# Altium PCB soldering_station.PcbDoc
Units mil, origin at the board's own origin, x right, y up, seen from the top; angles counter-clockwise.
Board outline 3150 x 1400 mil, 2 copper layers (Top Layer, Bottom Layer); 88 components, 44 nets, 261 pads, 16 vias.
Unrouted connection lines stored in the file: 50.
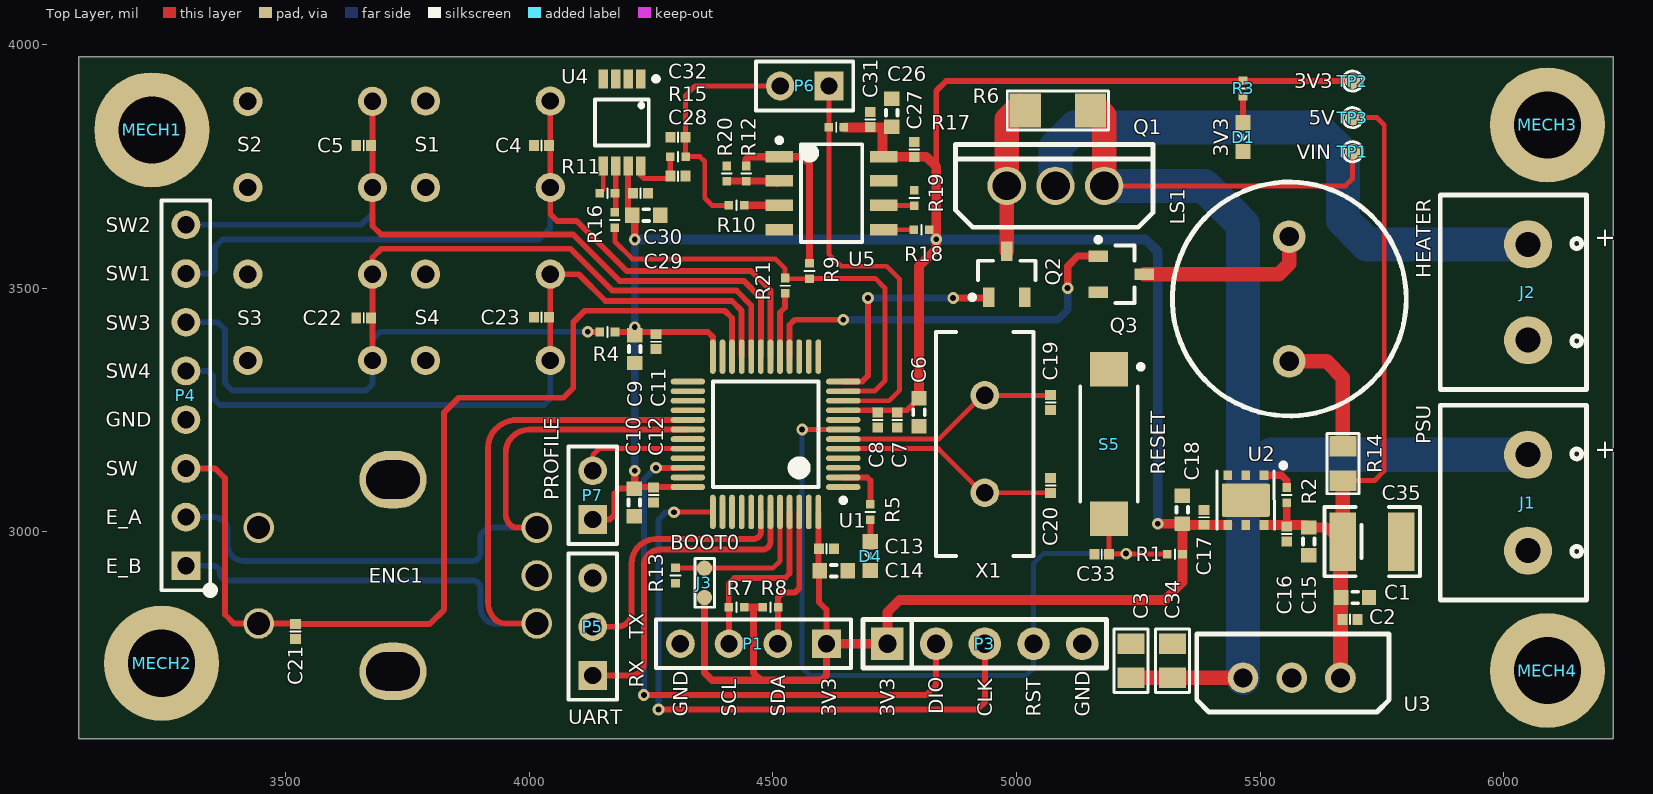
[diagram p0: Top Layer view]
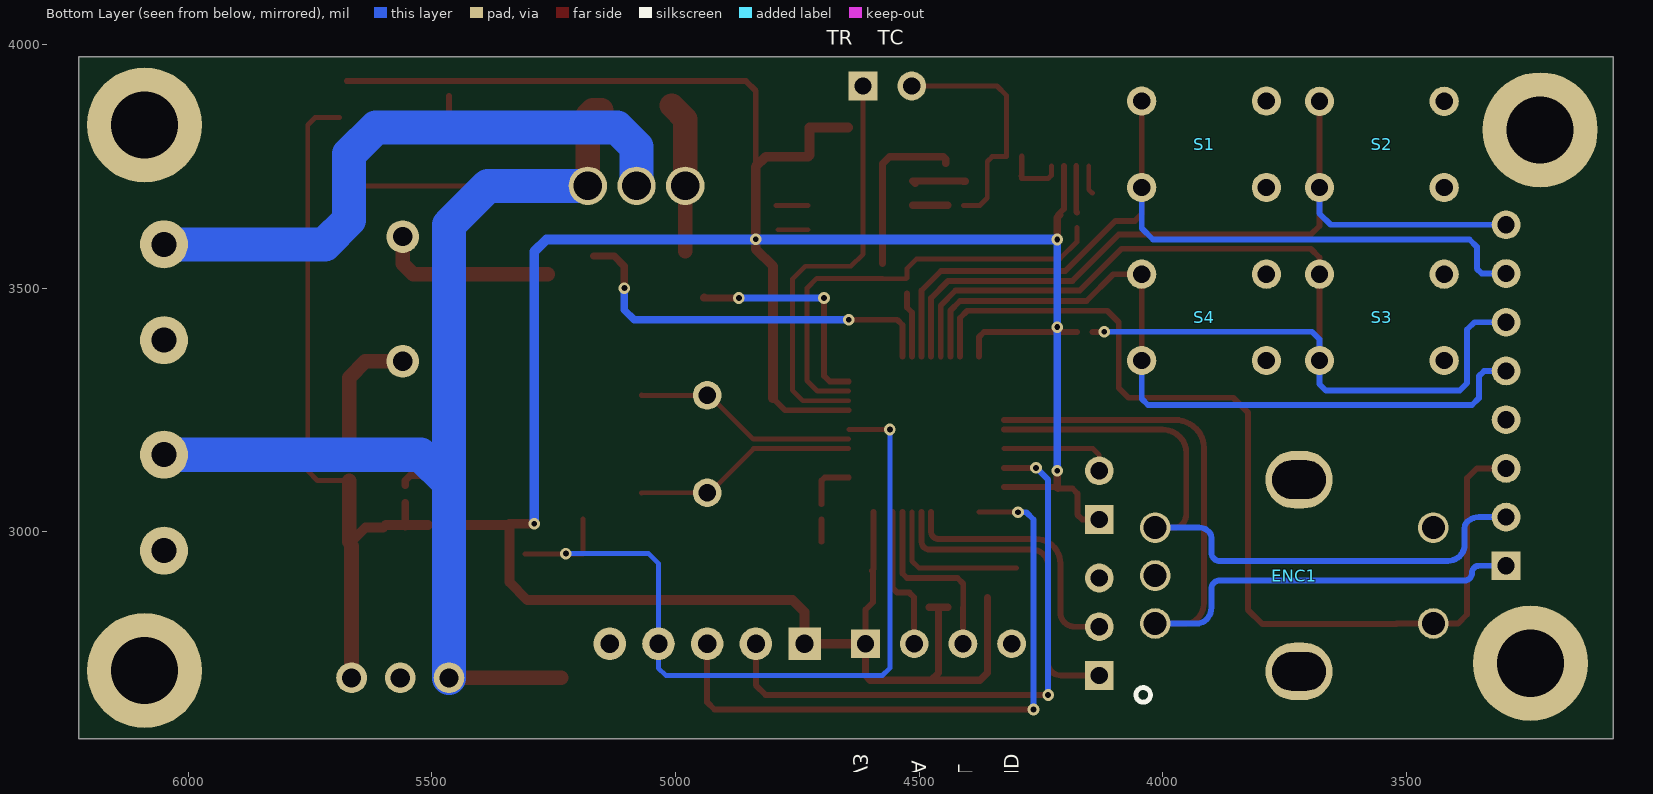
[diagram p1: Bottom Layer view, seen from below]
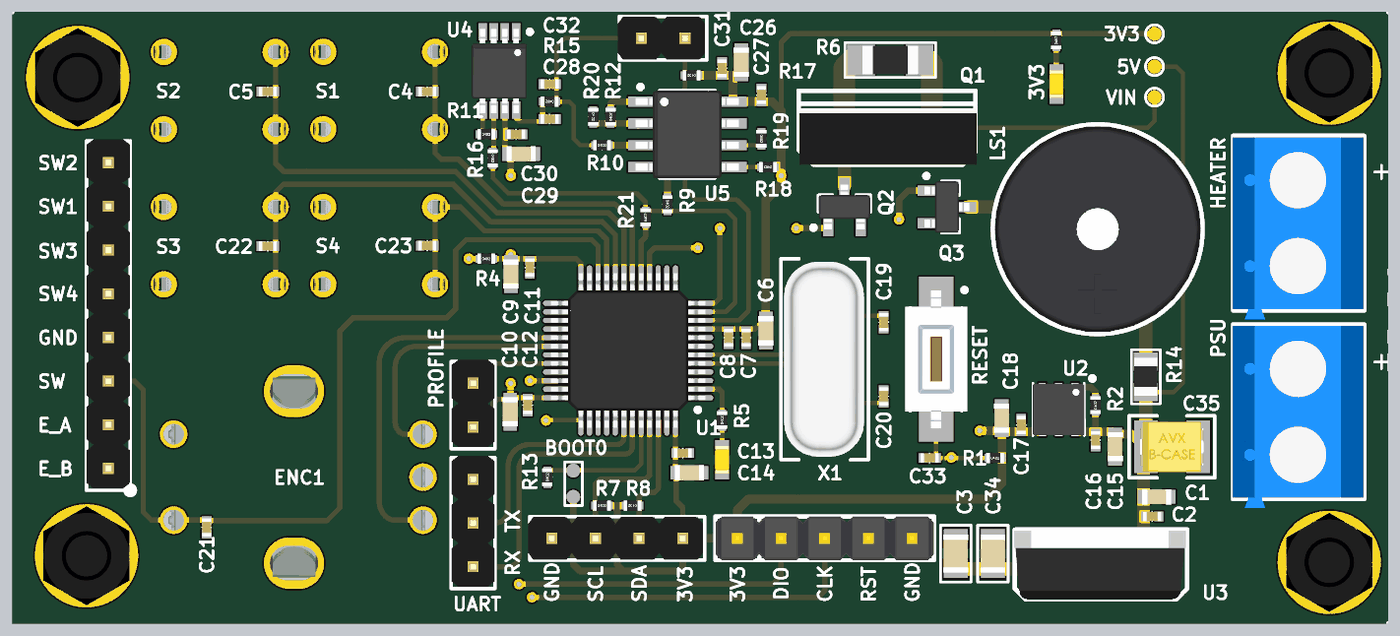
[diagram p2: 3D render of the assembled board from above, using the file's embedded part models]
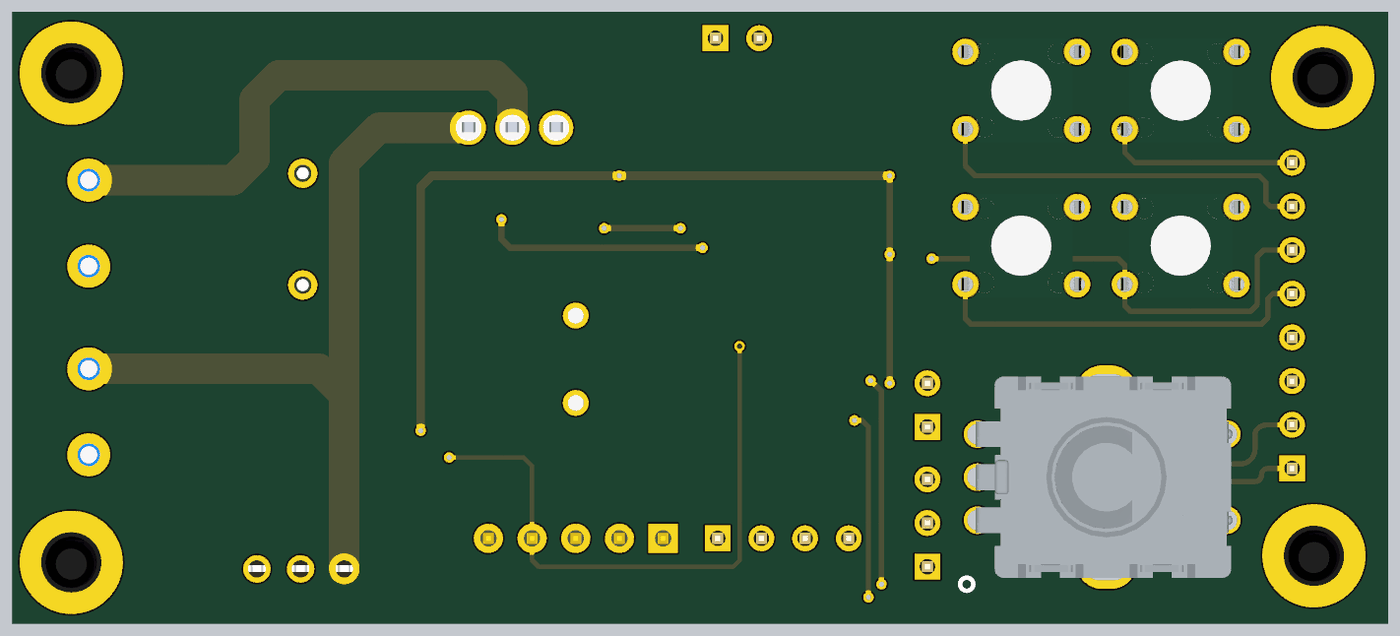
[diagram p3: 3D render of the assembled board from below, using the file's embedded part models]

## Layer stack, top to bottom
Top Solder: solder mask 0.4, Solder Resist, Dk 3.5
Top Layer: signal copper 1.4
Dielectric 1: dielectric 12.6, FR-4, Dk 4.8
Bottom Layer: signal copper 1.4
Bottom Solder: solder mask 0.4, Solder Resist, Dk 3.5

## Board outline
3075,2575 6225,2575 6225,3975 3075,3975

## Design rules (kind name [scope] priority, off if disabled: settings)
Clearance [All] p1: gap=6 ignorepadtopadclearanceinfootprint=TRUE
Height [All] p1: minheight=0 maxheight=1500 prefheight=500
HoleSize [All] p1: absolutevalues=TRUE maxlimit=150 minlimit=1 maxpercent=80.000 minpercent=20.000
PolygonConnect [All] p1: connectstyle=Relief reliefconductorwidth=10 reliefentries=4 polygonreliefangle="90 Angle" airgapwidth=10
RoutingVias [All] p1: holewidth=12 width=24 viastyle="Through Hole" minholewidth=12 minwidth=24 maxholewidth=24 maxwidth=48
SolderMaskExpansion [All] p1: expansion=4
Width [All] p1: maxlimit=150 minlimit=10 preferedwidth=15 minimp=50.000000 maximp=50.000000 favimp=50.000000
28 further rules are at their usual default settings.

## Classes and differential pairs
component class U_peripherals: C4 C5 C21 C22 C23 ENC1 S1 S2 S3 S4
component class top: MECH1 MECH2 MECH3 MECH4
component class U_heater: C26 C27 C28 C29 C30 C31 C32 Q1 Q2 R6 R9 R10 R11 R12 R15 R16 R17 R18 R19 R20 U4 U5
component class U_connectors: J1 J2 P1 P3 P4 P5 P6
component class U_PSU: C1 C2 C3 C15 C16 C17 C18 C34 C35 D1 R2 R3 TP1 TP2 TP3 U2 U3
component class U_MCU: C6 C7 C8 C9 C10 C11 C12 C13 C14 C19 C20 C33 D4 J3 LS1 P7 Q3 R1 R4 R5 R7 R8 R13 R14 R21 S5 U1 X1

## Components (designator, comment, footprint, x,y, rotation, side; value= is the part's Value field where it differs from the comment)
C1 "Ceramic X7R" C_0603_1608 5695,2865 r0 top value=1uF
C2 "Ceramic X7R" C_0402_1005 5684.65,2820 r0 top value=100nF
C3 "Ceramic X7R" C_0805_2012 5235,2735 r90 top value=330nF
C4 "Ceramic X7R" C_0402_1005 4025,3792.76 r180 top value=100nF
C5 "Ceramic X7R" C_0402_1005 3660,3792.76 r180 top value=100nF
C6 "Ceramic X7R" C_0603_1608 4800,3245.35 r270 top value=1uF
C7 "Ceramic X7R" C_0402_1005 4755,3229.53 r270 top value=100nF
C8 "Ceramic X7R" C_0402_1005 4715,3229.53 r270 top value=10nF
C9 "Ceramic X7R" C_0603_1608 4216.26,3375 r270 top value=1uF
C10 "Ceramic X7R" C_0603_1608 4215,3060 r270 top value=1uF
C11 "Ceramic X7R" C_0402_1005 4260,3390 r270 top value=100nF
C12 "Ceramic X7R" C_0402_1005 4255,3075 r270 top value=100nF
C13 "Ceramic X7R" C_0402_1005 4610,2965 r0 top value=100nF
C14 "Ceramic X7R" C_0603_1608 4625,2920 r0 top value=1uF
C15 "Ceramic X7R" C_0603_1608 5600,2980 r270 top value=1uF
C16 "Ceramic X7R" C_0402_1005 5555,2995 r270 top value=100nF
C17 "Ceramic X7R" C_0402_1005 5385,3029.65 r90 top value=100nF
C18 "Ceramic X7R" C_0603_1608 5340,3045 r90 top value=1uF
C19 "Ceramic C0G" C_0402_1005 5070,3265 r270 top value=22pF
C20 "Ceramic C0G" C_0402_1005 5070,3095 r90 top value=22pF
C21 "Ceramic X7R" C_0402_1005 3520,2795 r270 top value=100nF
C22 "Ceramic X7R" C_0402_1005 3660,3438.9 r180 top value=100nF
C23 "Ceramic X7R" C_0402_1005 4025,3440 r180 top value=100nF
C26 "Ceramic X7R" C_0603_1608 4743.86,3860 r90 top value=1uF
C27 "Ceramic X7R" C_0402_1005 4790,3785 r90 top value=100nF
C28 "Ceramic X7R" C_0402_1005 4305,3730 r0 top value=100nF
C29 "Ceramic X5R" C_0603_1608 4240,3650 r0 top value=10uF
C30 "Ceramic X7R" C_0402_1005 4228.39,3695 r0 top value=100nF
C31 "Ceramic X7R" C_0402_1005 4700,3845.91 r90 top value=100nF
C32 "Ceramic X7R" C_0402_1005 4305.35,3810 r180 top value=100nF
C33 "Ceramic X7R" C_0402_1005 5175,2954 r180 top value=100nF
C34 "Ceramic X7R" C_0805_2012 5320,2735 r90 top value=1uF
C35 "Tantalum Capacitor" CT_1210_3225 5730,2979.53 r0 top value=100uF
D1 "3V3" OL_0603_1608 5465,3810 r90 top value=LTST-C190KRKT
D4 "USER" OL_0603_1608 4700,2950 r90 top value=LTST-C190KRKT
ENC1 "Wurth Elektronik 482016514001" ENCODER 3720,2910 r90 bottom
J1 "PSU" J_ARK2 6050,3059.65 r270 top value=DG301-5.0-02P-12-18A(H)
J2 "HEATER" J_ARK2 6050,3491.57 r270 top value=DG301-5.0-02P-12-18A(H)
J3 "BOOT0" Contact_Point_2_Pad 4359.37,2895 r270 top
LS1 "LD-BZEN-1205" LD-BZEN-1205 5560,3477.76 r180 top
MECH1 "M3X0.5" MECH_SPACER_MALE_FEMALE_18MM_M3 3225,3825 r0 top value=TP-18
MECH2 "M3X0.5" MECH_SPACER_MALE_FEMALE_18MM_M3 3245,2730 r0 top value=TP-18
MECH3 "M3X0.5" MECH_SPACER_MALE_FEMALE_18MM_M3 6090,3835 r0 top value=TP-18
MECH4 "M3X0.5" MECH_SPACER_MALE_FEMALE_18MM_M3 6090,2715 r0 top value=TP-18
P1 "DISPLAY" P_HEADER_1x4_2.54 4610,2770 r180 top value=DS1021-1*4SF1-1
P3 "SWD" SWD_Header 4935,2770 r0 top
P4 "CONTROLS" P_HEADER_1x8_2.54 3295,2930 r90 top value=DS1021-1*8SF1-1
P5 "UART" P_HEADER_1x3_2.54 4130,2705 r90 top value=DS1021-1*3SF1-1
P6 "MEASURE" P_HEADER_1x2_2.54 4615,3915 r180 top value=DS1021-1*2SF1-1
P7 "PROFILE" P_HEADER_1x2_2.54 4130,3025 r90 top value=DS1021-1*2SF1-1
Q1 "IRF4905" IRF4905 5080,3710 r90 top
Q2 "NX7002AK" NX7002AK.215 4980,3528.58 r90 top
Q3 "NX7002AK" NX7002AK.215 5215,3528.58 r0 top
R1 "Resistor" R_0402_1005 5325,2954 r0 top value=100k
R2 "Resistor" R_0402_1005 5555,3075 r90 top value=100k
R3 "Resistor" R_0402_1005 5465,3910 r90 top value=470R
R4 "Resistor" R_0402_1005 4160,3410 r0 top value=22k
R5 "Resistor" R_0402_1005 4700,3040.55 r90 top value=470R
R6 "Resistor" R_1206_3216 5085,3865 r0 top value=1k
R7 "Resistor" R_0402_1005 4425,2845 r0 top value=4.7k
R8 "Resistor" R_0402_1005 4494.84,2845 r180 top value=4.7k
R9 "Resistor" R_0402_1005 4575.08,3535 r270 top value=0R
R10 "Resistor" R_0402_1005 4425,3670 r0 top value=1k
R11 "Resistor" R_0402_1005 4160,3695 r0 top value=0R
R12 "Resistor" R_0402_1005 4445,3735 r90 top value=10k
R13 "Resistor" R_0402_1005 4300,2910 r90 top value=100k
R14 "Resistor" R_0805_2012 5670,3140 r270 top value=100R
R15 "Resistor" R_0402_1005 4305,3770 r180 top value=0R
R16 "Resistor" R_0402_1005 4175,3640 r270 top value=0R
R17 "Resistor" R_0402_1005 4630,3830 r180 top value=470R
R18 "Resistor" R_0402_1005 4805,3620 r180 top value=1k
R19 "Resistor" R_0402_1005 4790,3685 r270 top value=1k
R20 "Resistor" R_0402_1005 4405,3735 r270 top value=1k
R21 "Resistor" R_0402_1005 4525,3505 r90 top value=1k
S1 "TACT-613N-F" TACT-613N-F 3915,3795.39 r90 bottom
S2 "TACT-613N-F" TACT-613N-F 3550,3795 r90 bottom
S3 "TACT-613N-F" TACT-613N-F 3550,3440 r90 bottom
S4 "TACT-613N-F" TACT-613N-F 3915,3440 r90 bottom
S5 "RESET" S_TACTSWITCH3x6 5190,3180 r270 top
TP1 "VIN" TP_PAD 5690,3780 r90 top
TP2 "3V3" TP_PAD 5690,3925 r90 top
TP3 "5V" TP_PAD 5690,3850 r90 top
U1 "STM32F103C8T6" LQFP48_7x7 4485,3200 r180 top
U2 "LD39050PU33R" DFN6_3x3 5470.75,3065 r180 top
U3 "LM7805" LM7805 5565,2700 r0 top
U4 "AD8495" AD8494 4190,3840 r270 top
U5 "OPA2342" OPA2342 4620.35,3695 r0 top
X1 "8MHz" X_HC49_THT 4935,3180 r270 top value=8Mhz

## Footprints (in the part's own frame and the unit in brackets; to place one, negate y for a bottom-side part, rotate by r counter-clockwise, add the part's x,y. Pads: shape width x height; smd on the part's side, far side on the other; paste and mask are expansions set on the pad)
AD8494 [mm] "Precision Thermocouple Amplifiers  with Cold Junction Compensation"
  rect 1x0.5 smd: 1(-2.275,0.975) 2(-2.275,0.325) 3(-2.275,-0.325) 4(-2.275,-0.975) 5(2.275,-0.975) 6(2.275,-0.325) 7(2.275,0.325) 8(2.275,0.975)
  silkscreen extent -2.4,-1.4 1.2,1.9, body extent -2.45,-1.6 2.45,1.6, height 1.1
C_0402_1005 [mm]
  rect 0.52x0.56 smd: 1(-0.39,0) 2(0.39,0)
  silkscreen extent 0,-0.25 0,0.25, body extent -0.52,-0.27 0.53,0.28, height 0.55
C_0603_1608 [mm]
  rect 0.75x0.8 smd: 1(-0.725,0) 2(0.725,0)
  silkscreen extent -0.15,-0.3 0.15,0.3, body extent -0.85,-0.45 0.85,0.45, height 0.89
C_0805_2012 [mil]
  rect 42x55 smd: 1(-35,0) 2(35,0)
  silkscreen extent -65,-35 65,35, body extent -43,-29 43,29, height 53
Contact_Point_2_Pad [mm] "Contact Point 0603"
  round 0.8 smd: 1(-0.762,0) 2(0.762,0)
CT_1210_3225 [mil]
  rect 54x120 smd: 1(-60,0) 2(60,0)
  silkscreen extent -98,-71 98,71, body extent -73,-58 73,58, height 80
DFN6_3x3 [mm]
  rect 0.45x0.5 smd: 1(-0.95,-1.3) 2(0,-1.3) 3(0.95,-1.3) 4(0.95,1.3) 5(0,1.3) 6(-0.95,1.3)
  rrect10% 2.5x1.75 smd: EP1(0,0)
  silkscreen extent -2.08,-1.93 1.5,1.52, body extent -1.5,-1.55 1.5,1.55, height 0.75
ENCODER [mm] "rotary encoder"
  round 1.6 hole 1.2: 1(-2.5,7.5) 2(0,7.5) 3(2.5,7.5) 4(-2.5,-7) 5(2.5,-7)
  oval 3x3.5 hole 2.8 slot 2 at 0 deg: 6(-5,0) 7(5,0)
  silkscreen extent -6.6,7.75 -5.84,8.51, body extent -5.85,-7.3 5.85,7.6, height 26.4
IRF4905 [mm] "PMOS TO220"
  round 2 hole 1.5: 1(0,2.54) 2(0,0) 3(0,-2.54)
  silkscreen extent -2.16,-5.08 2.16,5.21, body extent -2.16,-5.15 1.14,5.15, height 19.6
J_ARK2 [mm]
  round 2.5 hole 1.3: 1(-2.5,0) 2(2.5,0)
  silkscreen extent -5.08,-4.57 5.08,3.05, body extent -5,-4.6 5.6,3, height 10.05
LD-BZEN-1205 [mm] "Przetwornik dźwięku: elektromagnetyczny; THT; 2,4kHz; 40mA; H: 9mm"
  round 1.7 hole 1: 1(0,3.25) 2(0,-3.25)
  silkscreen extent -6.1,-6.1 6.1,6.1, body extent -5.99,-6 5.99,6, height 7.6
LM7805 [mm] "TO-220"
  round 1.6 hole 1: 1(-2.54,0) 2(0,0) 3(2.54,0)
  silkscreen extent -4.95,-1.78 5.08,2.29, body extent -5,-1.78 5,2.23, height 20
LQFP48_7x7 [mm] "LQFP, 48-Leads, Body 7x7mm, Pitch 0.5mm, IPC Medium Density"
  oval 1.8x0.3 smd: 1(-4.05,2.75) 2(-4.05,2.25) 3(-4.05,1.75) 4(-4.05,1.25) 5(-4.05,0.75) 6(-4.05,0.25) 7(-4.05,-0.25) 8(-4.05,-0.75) 9(-4.05,-1.25) 10(-4.05,-1.75) 11(-4.05,-2.25) 12(-4.05,-2.75) 25(4.05,-2.75) 26(4.05,-2.25) 27(4.05,-1.75) 28(4.05,-1.25) 29(4.05,-0.75) 30(4.05,-0.25) 31(4.05,0.25) 32(4.05,0.75) 33(4.05,1.25) 34(4.05,1.75) 35(4.05,2.25) 36(4.05,2.75)
  oval 0.3x1.8 smd: 13(-2.75,-4.05) 14(-2.25,-4.05) 15(-1.75,-4.05) 16(-1.25,-4.05) 17(-0.75,-4.05) 18(-0.25,-4.05) 19(0.25,-4.05) 20(0.75,-4.05) 21(1.25,-4.05) 22(1.75,-4.05) 23(2.25,-4.05) 24(2.75,-4.05) 37(2.75,4.05) 38(2.25,4.05) 39(1.75,4.05) 40(1.25,4.05) 41(0.75,4.05) 42(0.25,4.05) 43(-0.25,4.05) 44(-0.75,4.05) 45(-1.25,4.05) 46(-1.75,4.05) 47(-2.25,4.05) 48(-2.75,4.05)
  silkscreen extent -4.18,-2.75 2.75,3.57, body extent -4.5,-4.5 4.5,4.5, height 1.6
MECH_SPACER_MALE_FEMALE_18MM_M3 [mm]
  round 6 hole 3.5: 1(0,0)
  body extent -2.5,-2.89 2.5,2.89, height 18
NX7002AK.215 [mm] "Tranzystor: N-MOSFET; unipolarny; 60V; 0,12A; 325mW; SOT23"
  rect 1x0.6 smd: 1(-1.2,0.95) 2(-1.2,-0.95) 3(1.2,0)
  silkscreen extent -1.32,-1.5 0.7,1.92, body extent -1.3,-1.5 1.3,1.5, height 1.2
OL_0603_1608 [mm]
  rect 0.8x0.8 smd: 1(-0.75,0) 2(0.75,0)
  silkscreen extent -0.15,-0.25 0.15,0.25, body extent -0.8,-0.4 0.8,0.4, height 0.75
OPA2342 [mm] "Wzmacniacz operacyjny; 1MHz; 2,7÷5,5V; Kana³y: 2; SO8"
  rect 1.45x0.6 smd: 1(-2.725,1.905) 2(-2.725,0.635) 3(-2.725,-0.635) 4(-2.725,-1.905) 5(2.725,-1.905) 6(2.725,-0.635) 7(2.725,0.635) 8(2.725,1.905)
  silkscreen extent -2.85,-2.55 1.6,2.88, body extent -3,-2.55 3,2.55, height 2.5
P_HEADER_1x2_2.54 [mm] "Connector; Header; 2 Position; Straight; Male"
  rect 1.5x1.5 hole 0.9: 1(0,0)
  round 1.5 hole 0.9: 2(2.54,0)
  silkscreen extent -1.27,-1.27 3.81,1.27, body extent -1.17,-1.25 3.91,1.25, height 8.2
P_HEADER_1x3_2.54 [mm] "Connector; Header; 3 Position, Male"
  rect 1.5x1.5 hole 0.9: 1(0,0)
  round 1.5 hole 0.9: 2(2.54,0) 3(5.08,0)
  silkscreen extent -1.27,-1.27 6.35,1.27, body extent -1.17,-1.25 6.45,1.25, height 8.2
P_HEADER_1x4_2.54 [mm] "Connector; Header; 4 Position; Male"
  rect 1.5x1.5 hole 0.9: 1(0,0)
  round 1.5 hole 0.9: 2(2.54,0) 3(5.08,0) 4(7.62,0)
  silkscreen extent -1.27,-1.27 8.89,1.27, body extent -1.17,-1.25 8.99,1.25, height 8.2
P_HEADER_1x8_2.54 [mm] "Connector; Header; 8 Position; Male"
  rect 1.5x1.5 hole 0.9: 1(0,0)
  round 1.5 hole 0.9: 2(2.54,0) 3(5.08,0) 4(7.62,0) 5(10.16,0) 6(12.7,0) 7(15.24,0) 8(17.78,0)
  silkscreen extent -1.47,-1.47 19.05,1.27, body extent -1.17,-1.25 19.15,1.25, height 8.2
R_0402_1005 [mm]
  rect 0.45x0.45 smd: 1(-0.4,0) 2(0.4,0)
  silkscreen extent 0,-0.25 0,0.25, body extent -0.52,-0.3 0.52,0.3, height 0.34
R_0805_2012 [mil]
  rect 42x55 smd: 1(-35,0) 2(35,0)
  silkscreen extent -62,-33 62,33, body extent -43,-27 43,27, height 27
R_1206_3216 [mil]
  rect 64x70 smd: 1(-67,0) 2(67,0)
  silkscreen extent -104,-40 104,40, body extent -64,-32 64,32, height 27
S_TACTSWITCH3x6 [mm] "SODFL, 2-Leads, Body 3,00x8,00mm, IPC Medium Density"
  rect 1.8x2 smd: 1(-3.9,0) 2(3.9,0)
  silkscreen extent -4.15,-1.5 3,1.78, body extent -4,-1.8 4,1.8, height 2.6
SWD_Header [mm] "SWD_Header 1x5 2.54mm"
  rect 1.7x1.7 hole 0.95: 1(-5.08,0)
  round 1.7 hole 0.95: 2(-2.54,0) 3(0,0) 4(2.54,0) 5(5.08,0)
  silkscreen extent -6.35,-1.27 6.35,1.27, body extent -6.35,-1.27 6.35,1.27, height 9.6
TACT-613N-F [mm] "Mikroprze彻cznik TACT; SPST-NO; Pozycje: 2; 0,05A/12VDC"
  round 1.524 hole 0.9: 1(-2.25,3.25) 2(2.25,3.25) 3(-2.25,-3.25) 4(2.25,-3.25)
  body extent -3,-3.85 3,3.85, height 7
TP_PAD [mil] "Small SMD testpoint"
  round 32 smd paste-16: 1(0,0)
  silkscreen extent -21,-21 21,21
X_HC49_THT [mm] "HC49, 2-Leads, 200mil spacing"
  round 1.5 hole 0.9: 1(-2.54,0) 2(2.54,0)
  silkscreen extent -5.84,-2.54 5.84,2.54, body extent -5.68,-2.36 5.67,2.29, height 3.5

## Part data
C1 C6 C9 C10 C14 C15 C18 C26: library part C_1uF_25V_X7R_0603_10, "Capacitor", Dielectric=X7R, Manufacturer=Samsung, Manufacturer Part Number=CL10B105KA8NNNC, Tolerance (%)=10, Voltage=25V, HelpURL=http://www.tme.eu/pl/Document/4a42202b32dab16128fe107dd69598cc/samsung-chip-cap.pdf, Part Number=C_1uF_25V_X7R_0603_10, SCH_Footprint=0603, Supplier 1=TME, Supplier 2="RS Components", Supplier 3=Farnell, Supplier 4=Mouser, Supplier 5=Digi-Key, Supplier Part Number 1=CL10B105KA8NNNC
C2 C4 C5 C7 C11 C12 C13 C16 C17 C21 C22 C23 C28 C30 C32 C33: library part C_100nF_16V_X7R_0402_10, "Capacitor", Dielectric=X7R, Manufacturer=Murata, Manufacturer Part Number=GRM155R71C104KA88D, Tolerance (%)=10, Voltage=16V, HelpURL=https://www.mouser.com/ds/2/281/c02e-2905.pdf, Part Number=C_100nF_16V_X7R_0402_10, SCH_Footprint=0402, Supplier 1=TME, Supplier 2="RS Components", Supplier 3=Farnell, Supplier 4=Mouser, Supplier 5=Digi-Key, Supplier Part Number 4=81-GRM155R71C104KA88
C3: library part C_2.2uF_25V_X7R_0805_10, "Capacitor", Dielectric=X7R, Manufacturer=Murata, Manufacturer Part Number=GCM21BR71E225KA73L, Tolerance (%)=10, Voltage=50V, HelpURL=http://www.tme.eu/pl/Document/8ba767cb01dfa0e767d35427fa0d0fc6/GCM21BR71E225KA73-01.pdf, Part Number=C_2.2uF_25V_X7R_0805_10, SCH_Footprint=0805, Supplier 1=TME, Supplier 2="RS Components", Supplier 3=Farnell, Supplier 4=Mouser, Supplier 5=Digi-Key, Supplier Part Number 1=GCM21BR71E225KA73L, Supplier Part Number 2=7235045, Supplier Part Number 3=2470436, Supplier Part Number 4=81-81-GCM21BR71E225KA3L, Supplier Part Number 5=490-4787-1-ND
C8: library part C_10nF_25V_X7R_0402_10, "Capacitor", Dielectric=X7R, Manufacturer=Murata, Manufacturer Part Number=GRM155R71E103KA01D, Tolerance (%)=10, Voltage=25V, HelpURL=http://www.tme.eu/en/Document/e3e731e59cc68b1ab6d46b158bb05733/MURATA_GRM.pdf, Part Number=C_10nF_25V_X7R_0402_10, SCH_Footprint=0402, Supplier 1=TME, Supplier 2="RS Components", Supplier 3=Farnell, Supplier 4=Mouser, Supplier 5=Digi-Key, Supplier Part Number 1=GRM155R71E103KA01D, Supplier Part Number 2=6242301, Supplier Part Number 3=8819734, Supplier Part Number 4=81-GRM36X103K25, Supplier Part Number 5=490-1312-1-ND
C19 C20: library part C_22pF_50V_C0G_0402_5, "Capacitor", Dielectric=C0G, Manufacturer=AVX, Manufacturer Part Number=04025A220JAT2A, Tolerance (%)=5, Voltage=50V, HelpURL=http://datasheet.octopart.com/04025A220JAT2A-AVX-datasheet-9883399.pdf, Part Number=C_22pF_50V_C0G_0402_5, SCH_Footprint=0402, Supplier 1=TME, Supplier 2="RS Components", Supplier 3=Farnell, Supplier 4=Mouser, Supplier 5=Digi-Key, Supplier Part Number 1=04025A220JAT2A, Supplier Part Number 2=6983087, Supplier Part Number 3=2280776, Supplier Part Number 4=581-04025A220J, Supplier Part Number 5=478-1074-1-ND
C27 C31: library part C_100nF_50V_X7R_0402_10, "Capacitor", Dielectric=X7R, Manufacturer=Murata, Manufacturer Part Number=GRM155R71H104KE14D, Tolerance (%)=10, Voltage=50V, HelpURL=http://docs-europe.electrocomponents.com/webdocs/145f/0900766b8145f9d2.pdf, Part Number=C_100nF_50V_X7R_0402_10, SCH_Footprint=0402, Supplier 1=TME, Supplier 2="RS Components", Supplier 3=Farnell, Supplier 4=Mouser, Supplier 5=Digi-Key, Supplier Part Number 1=GRM155R71H104KE14D, Supplier Part Number 2=8847087, Supplier Part Number 3=2611912, Supplier Part Number 4=81-GRM155R71H104KE4D, Supplier Part Number 5=490-10700-1-ND
C29: library part C_10uF_16V_X5R_0603_20, "Capacitor", Dielectric=X5R, Manufacturer="Samsung Electro-Mechanics", Manufacturer Part Number=CL10A106MO8NQNC, Tolerance (%)=20, Voltage=16V, HelpURL=http://www.tme.eu/pl/Document/4a42202b32dab16128fe107dd69598cc/samsung-chip-cap.pdf, Part Number=C_10uF_16V_X5R_0603_20, SCH_Footprint=0603, Supplier 1=TME, Supplier 2="RS Components", Supplier 3=Farnell, Supplier 4=Mouser, Supplier 5=Digi-Key, Supplier Part Number 1=CL10A106MO8NQNC
C34: library part C_2.2uF_25V_X7R_0805_10, "Capacitor", Dielectric=X7R, Manufacturer=Murata, Manufacturer Part Number=GCM21BR71E225KA73L, Tolerance (%)=10, Voltage=25V, HelpURL=http://www.tme.eu/pl/Document/8ba767cb01dfa0e767d35427fa0d0fc6/GCM21BR71E225KA73-01.pdf, Part Number=C_2.2uF_25V_X7R_0805_10, SCH_Footprint=0805, Supplier 1=TME, Supplier 2="RS Components", Supplier 3=Farnell, Supplier 4=Mouser, Supplier 5=Digi-Key, Supplier Part Number 1=GCM21BR71E225KA73L, Supplier Part Number 2=7235045, Supplier Part Number 3=2470436, Supplier Part Number 4=81-81-GCM21BR71E225KA3L, Supplier Part Number 5=490-4787-1-ND
C35: library part CT_100uF_10V_TA2O5_1210_20, "Capacitor", Dielectric=TA2O5, Manufacturer=AVX, Manufacturer Part Number=TAJB107M010RNJ, Supplier Part Number 1=TAJB107M010R, Tolerance (%)=20, Voltage=10V, HelpURL=https://datasheet.octopart.com/TAJB107M010RNJ-AVX-datasheet-12511273.pdf, Part Number=CT_100uF_10V_TA2O5_1210_20, SCH_Footprint=1210, Supplier 1=TME, Supplier 2="RS Components", Supplier 3=Farnell, Supplier 4=Mouser, Supplier 5=Digi-Key, Supplier Part Number 2=1360118, Supplier Part Number 3=1658150, Supplier Part Number 4=581-TAJB107M010R, Supplier Part Number 5=478-5801-1-ND
D1 D4: library part OL_R_0603, "LED_RED", Manufacturer=Lite-On, Manufacturer Part Number=LTST-C190KRKT, HelpURL=https://datasheet.octopart.com/LTST-C190KRKT-Lite-On-datasheet-158191.pdf, Part Number=OL_R_0603, SCH_Footprint=0603, Supplier 1=TME, Supplier 2="RS Components", Supplier 3=Farnell, Supplier 4=Mouser, Supplier 5=Digi-Key, Supplier Part Number 1=LTST-C190KRKT, Supplier Part Number 2=1769795, Supplier Part Number 4=859-LTST-C190KRKT, Supplier Part Number 5=160-1436-1-ND
ENC1: library part ENCODER
J1 J2: library part J_TB-5.0-P-2P, "ARK Screw terminal, 2-Pin", Manufacturer="DEGSON ELECTRONICS", Manufacturer Part Number=DG301-5.0-02P-12-18A(H), Supplier Part Number 1=DG301-5.0-2/6B, Component Type=Standard, HelpURL=https://datasheet.octopart.com/DG301-5.0-03P-12-18A%28H%29-Degson-datasheet-17801202.pdf, Part Number=J_TB-5.0-P-2P, SCH_Footprint=ARK2, Supplier 1=TME, Supplier 2="RS Components", Supplier 3=Farnell, Supplier 4=Mouser, Supplier 5=Digi-Key
J3: library part Contact_Point_2_Pad, "Contact_Point_2_Pad"
LS1: "Przetwornik dźwięku: elektromagnetyczny; THT; 2,4kHz; 40mA; H: 9mm"
MECH1 MECH2 MECH3 MECH4: library part MECH_SPACER_MALE_FEMALE_18MM_M3, Manufacturer=FIX&FASTEN, Manufacturer Part Number=TP-18, HelpURL=http://www.tme.eu/pl/Document/c63f116060195082d899531b8f30ddf7/TP-10.pdf, Part Number=MECH_SPACER_MALE_FEMALE_18MM_M3, SCH_Footprint=M3, Supplier 1=TME, Supplier 2="RS Components", Supplier 3=Farnell, Supplier 4=Mouser, Supplier 5=Digi-Key, Supplier Part Number 1=TP-18
P1: library part P_HEADER_1x4_2.54, "Header, 4-Pin", Manufacturer=Connfly, Manufacturer Part Number=DS1021-1*4SF1-1, Supplier Part Number 1=ZL201-04G, Component Type=Standard, HelpURL=http://datasheet.octopart.com/DS1021-1%2A4SF1-1-Connfly-datasheet-65537859.pdf, Part Number=P_HEADER_1x4_2.54, SCH_Footprint="1x4 2.54mm", Supplier 1=TME, Supplier 2="RS Components", Supplier 3=Farnell, Supplier 4=Mouser, Supplier 5=Digi-Key
P3: library part SWD_Header, "1x5 2.54 SWD Header"
P4: library part P_HEADER_1x8_2.54, "Header, 8-Pin", Manufacturer=Connfly, Manufacturer Part Number=DS1021-1*8SF1-1, Supplier Part Number 1=ZL201-08G, Component Type=Standard, HelpURL=http://www.tme.eu/en/Document/cc301e58a5da78cb543a94b5a5b7f06a/DS1021.pdf, Part Number=P_HEADER_1x8_2.54, SCH_Footprint="1x8 2.54mm", Supplier 1=TME, Supplier 2="RS Components", Supplier 3=Farnell, Supplier 4=Mouser, Supplier 5=Digi-Key
P5: library part P_HEADER_1x3_2.54, "Header, 3-Pin", Manufacturer=Connfly, Manufacturer Part Number=DS1021-1*3SF1-1, Supplier Part Number 1=ZL201-03G, Component Type=Standard, HelpURL=http://www.tme.eu/en/Document/cc301e58a5da78cb543a94b5a5b7f06a/DS1021.pdf, Part Number=P_HEADER_1x3_2.54, SCH_Footprint="1x3 2.54mm", Supplier 1=TME, Supplier 2="RS Components", Supplier 3=Farnell, Supplier 4=Mouser, Supplier 5=Digi-Key
P6 P7: library part P_HEADER_1x2_2.54, "Header, 2-Pin", Manufacturer=Connfly, Manufacturer Part Number=DS1021-1*2SF1-1, Supplier Part Number 1=ZL201-02G, Component Type=Standard, HelpURL=http://www.tme.eu/en/Document/cc301e58a5da78cb543a94b5a5b7f06a/DS1021.pdf, Part Number=P_HEADER_1x2_2.54, SCH_Footprint="1x2 2.54mm", Supplier 1=TME, Supplier 2="RS Components", Supplier 3=Farnell, Supplier 4=Mouser, Supplier 5=Digi-Key
Q1: "PMOS TO-220"
Q2 Q3: library part NX7002AK.215, "Tranzystor: N-MOSFET; unipolarny; 60V; 0,12A; 325mW; SOT23"
R1 R2 R7 R8 R13: library part R_100k_0402_1, Manufacturer=Yageo, Manufacturer Part Number=RC0402FR-07100KL, Power=63mW, Supplier Part Number 1=RC0402FR-07100K, Tolerance=1%, Voltage=50V, HelpURL=http://www.tme.eu/pl/Document/1a2bc76e2be68b3b1670068306778ce6/rc0402yageo.pdf, Part Number=R_100k_0402_1, SCH_Footprint=0402, Supplier 1=TME, Supplier 2="RS Components", Supplier 3=Farnell, Supplier 4=Mouser, Supplier 5=Digi-Key, Supplier Part Number 3=2131798, Supplier Part Number 4=603-RC0402FR-07100KL, Supplier Part Number 5=311-100KLRCT-ND
R3 R5 R17: library part R_470R_0402_1, Manufacturer=Yageo, Manufacturer Part Number=RC0402FR-07470RL, Power=63mW, Supplier Part Number 1=RC0402FR-07470R, Tolerance=1%, Voltage=50V, HelpURL=http://datasheet.octopart.com/RC0402FR-07470RL-Yageo-datasheet-10408619.pdf, Part Number=R_470R_0402_1, SCH_Footprint=0402, Supplier 1=TME, Supplier 2="RS Components", Supplier 3=Farnell, Supplier 4=Mouser, Supplier 5=Digi-Key, Supplier Part Number 3=9239197, Supplier Part Number 4=603-RC0402FR-07470RL, Supplier Part Number 5=311-470LRCT-ND
R4: library part R_22k_0402_1, Manufacturer=Panasonic, Manufacturer Part Number=ERA-2AEB223X, Power=63mW, Tolerance=1%, Voltage=50V, HelpURL=http://www.mouser.com/ds/2/315/AOA0000C237-1100991.pdf, Part Number=R_22k_0402_1, SCH_Footprint=0402, Supplier 1=TME, Supplier 2="RS Components", Supplier 3=Farnell, Supplier 4=Mouser, Supplier 5=Digi-Key, Supplier Part Number 2=566557, Supplier Part Number 3=1577719, Supplier Part Number 4=667-ERA-2AEB223X, Supplier Part Number 5=P22KDCCT-ND
R6: library part R_47k_1206_1, Manufacturer=Royalohm, Manufacturer Part Number=HP06W2F4702T5E, Power=500mW, Supplier Part Number 1=HP06-47K1%, Tolerance=1%, Voltage=200V, HelpURL=https://www.tme.eu/pl/Document/fa390a0a31e891a154d3713216995c6e/HighPowerHP.pdf, Part Number=R_47k_1206_1, SCH_Footprint=1206, Supplier 1=TME, Supplier 2="RS Components", Supplier 3=Farnell, Supplier 4=Mouser, Supplier 5=Digi-Key
R9 R11 R15 R16: library part R_0R_0402_5, Manufacturer=Rohm, Manufacturer Part Number=PMR01ZZPJ000, Power=100mW, Tolerance=5%, Voltage=50V, HelpURL=https://pl.mouser.com/datasheet/2/348/pmr-jpw-e-1139188.pdf, Part Number=R_0R_0402_5, SCH_Footprint=0402, Supplier 1=TME, Supplier 2="RS Components", Supplier 3=Farnell, Supplier 4=Mouser, Supplier 5=Digi-Key, Supplier Part Number 4=755-PMR01ZZPJ000, Supplier Part Number 5=RHM1692-6-ND
R10 R18 R19 R20 R21: library part R_1k_0402_1, Manufacturer=Yageo, Manufacturer Part Number=RC0402FR-071K, Power=63mW, Tolerance=1%, Voltage=50V, HelpURL=http://www.tme.eu/pl/Document/1a2bc76e2be68b3b1670068306778ce6/rc0402yageo.pdf, Part Number=R_1k_0402_1, SCH_Footprint=0402, Supplier 1=TME, Supplier 2="RS Components", Supplier 3=Farnell, Supplier 4=Mouser, Supplier 5=Digi-Key, Supplier Part Number 1=RC0402FR-071K, Supplier Part Number 3=9239235, Supplier Part Number 4=603-RC0402FR-071KP, Supplier Part Number 5=311-1.00KLRCT-ND
R12: library part R_10k_0402_1, Manufacturer=Yageo, Manufacturer Part Number=RC0402FR-0710KL, Power=63mW, Supplier Part Number 1=RC0402FR-0710K, Tolerance=1%, Voltage=50V, HelpURL=http://www.tme.eu/pl/Document/1a2bc76e2be68b3b1670068306778ce6/rc0402yageo.pdf, Part Number=R_10k_0402_1, SCH_Footprint=0402, Supplier 1=TME, Supplier 2="RS Components", Supplier 3=Farnell, Supplier 4=Mouser, Supplier 5=Digi-Key
R14: library part R_100R_0805_1, Manufacturer=Yageo, Manufacturer Part Number=RC0805FR-07100RL, Power=125mW, Supplier Part Number 1=RC0805FR-07100R, Tolerance=1%, Voltage=150V, HelpURL=https://www.tme.eu/pl/Document/7b8fed8c112f8a94930279c22c957f7f/rc0805yageo.pdf, Part Number=R_100R_0805_1, SCH_Footprint=0805, Supplier 1=TME, Supplier 2="RS Components", Supplier 3=Farnell, Supplier 4=Mouser, Supplier 5=Digi-Key, Supplier Part Number 2=618-5135, Supplier Part Number 3=9237364, Supplier Part Number 4=603-RC0805FR-07100RL, Supplier Part Number 5=311-100CRCT-ND
S5: library part S_TACTSWITCH, "Tact Switch", Manufacturer=Ninigi, Manufacturer Part Number=TACTM-34N-F, HelpURL=http://pl.ninigi.com/product/tactm-34n-f/pdf, Part Number=S_TACTSWITCH, SCH_Footprint=3x6mm, Supplier 1=TME, Supplier 2="RS Components", Supplier 3=Farnell, Supplier 4=Mouser, Supplier 5=Digi-Key, Supplier Part Number 1=TACTM-34N-F
TP1 TP2 TP3: library part TP_PAD, "Testpoint", Component Type="Standard (No BOM)", Part Number=TP_PAD, SCH_Footprint=SMD, Supplier 1=TME, Supplier 2="RS Components", Supplier 3=Farnell, Supplier 4=Mouser, Supplier 5=Digi-Key
U1: library part UP_STM32F103C8T6, Manufacturer=STMicroelectronics, HelpURL=https://datasheet.octopart.com/STM32F103C8T6-STMicroelectronics-datasheet-48026265.pdf, Manufacturer Part Number=STM32F103C8T6, Part Number=UP_STM32F103C8T6, SCH_Footprint=LQFP48, Supplier 1=TME, Supplier 2="RS Components", Supplier 3=Farnell, Supplier 4=Mouser, Supplier 5=Digi-Key, Supplier Part Number 1=STM32F103C8T6, Supplier Part Number 2=1023545, Supplier Part Number 3=1447637, Supplier Part Number 4=511-STM32F103C8T6, Supplier Part Number 5=497-6063-ND
U2: library part VL_LD39050PU33R, Current=500mA, Manufacturer=STMicroelectronics, Voltage=3.3V, HelpURL=https://www.tme.eu/pl/Document/062513da0f421ddb82a14a498f7bf1c8/LD39050.pdf, Manufacturer Part Number=LD39050PU33R, Part Number=VL_LD39050PU33R, SCH_Footprint=DFN6, Supplier 1=TME, Supplier 2="RS Components", Supplier 3=Farnell, Supplier 4=Mouser, Supplier 5=Digi-Key, Supplier Part Number 1=LD39050PU33R, Supplier Part Number 3=2762703, Supplier Part Number 4=511-LD39050PU33R, Supplier Part Number 5=497-8716-1-ND
U3: "linear voltage stabilizer"
U4: "Precision Thermocouple Amplifiers / with Cold Junction Compensation"
U5: "Wzmacniacz operacyjny; 1MHz; 2,7÷5,5V; Kana³y: 2; SO8"
X1: library part X_HC49US-FF5F18-16.0000, "Resonator Ceramic", Manufacturer=Ilsi, Manufacturer Part Number=HC49US-FF3F18-16.0000, Supplier Part Number 1=HC49US-FF5F16.0000, HelpURL=http://www.tme.eu/pl/Document/6c671fc2d1c29550257ca2d207d0534f/HC49US_Series.pdf, Part Number=X_HC49US-FF5F18-16.0000, SCH_Footprint="HC49 THT", Supplier 1=TME, Supplier 2="RS Components", Supplier 3=Farnell, Supplier 4=Mouser, Supplier 5=Digi-Key

## Via types
v1: diameter 24, hole 12, Top Layer to Bottom Layer, 16 vias

## Nets (pads, with @x,y where several pads share a name; then routed paths per layer and width w, separated by ;. In a path a pad name is that pad's centre, name@x,y a point inside that pad or via, vN(x,y) a via of type N, cw(c..) or ccw(c..) an arc to the next point about the centre after c; other vN are vias at no path point)
3.3V: C6.1 C7.1 C8.1 C9.1 C10.1 C11.1 C12.1 C13.1 C14.1 C17.1 C18.1 C26.1 C27.1 C29.1 C30.1 C31.1 J3.2 P1.1 P3.1 P7.1 R1.2 R3.2 R4.2 R7.2 R8.2 R17.1 R18.1 TP2.1 U1.9 U1.24 U1.36 U1.48 U2.4 U4.7 U5.8 | length 6752.2
  Top Layer w12: P7.1 4165,3025 4175,3035 4175,3078.54 4185,3088.54 C10.1 ; R4.2 C9.1@4211.46,3410 ; U4.7 4202.8,3662.4 C29.1@4215.2,3650 ; C10.1@4216.26,3089.8 4218.19,3091.73 U1.36 ; C9.1@4216.26,3410 4366.73,3410 4376.73,3400 U1.24 ; U1.48 4593.27,2923.19 C14.1 4594.65,2918.19 4594.65,2855.35 4610,2840 P1.1 ; U1.9 4775.31,3249.21 C6.1 ; 4835.31,3749.33 4835.31,3905 4855.31,3925 TP2.1@5675,3925
  Top Layer w15: C29.1 4216.26,3645.2 v1(4216.26,3600) ; C10.1 4216.26,3089.8 v1(4216.26,3125) ; J3.2 4359.37,2710.63 4375,2695 4475,2695 ; R7.2 4455,2845 ; R8.2 4455,2845 ; P1.1 4610,2705 4600,2695 4475,2695 ; 4455,2845 4460,2840 4460,2710 4475,2695
  Top Layer w20: P1.1 P3.1 4735,2835 4760,2860 ; R17.1 4725,3830 4725,3772.64 U5.8 4789.65,3770 C27.1 4815,3769.65 4835.31,3749.33 v1(4835.31,3600.32) 4835.31,3580.32 4800,3545 C6.1 ; 4765,2860 5304.41,2860 5340.75,2896.34 R1.2 C18.1@5340.75,3015.71 ; v1(5290,3016.46) C18.1 C18.1@5340.75,3015.71 ; U2.4 5342.64,3013.82 C18.1@5340.75,3015.71
  Bottom Layer w15: v1(4216.26,3125) v1(4216.26,3420) v1(4216.26,3600)
  Bottom Layer w20: v1(4216.26,3600) 5265,3600 5290,3575 v1(5290,3016.46)
5V: C1.1 C2.1 C15.1 C16.1 C35.1 R2.1 R14.2 TP3.1 U2.6 U3.3 | length 1500.4
  Top Layer w10: R14.2 5735,3105 5755,3125 5755,3835 5740,3850 TP3.1
  Top Layer w15: C16.1 5555,3013.82 R2.1
  Top Layer w20: U2.6 5555,3013.82 5594.72,3013.82 C15.1 5636.46,3008.54 5665,2980 C35.1@5665,2970 ; U3.3@5665,2699.29 U3.3
  Top Layer w30: U3.3 C35.1@5665,2970 ; C35.1 R14.2
BOOT0: J3.1 R13.2 U1.44 | length 321.3
  Top Layer w10: R13.2 4500.75,2925.75 4514.53,2939.53 U1.44
BUZZER: Q3.1 U1.16 | length 809.8
  Top Layer w12: U1.16 4534.21,3424.21 4545,3435 v1(4644.45,3435)
  Top Layer w15: v1(5105,3500) 5105,3545 5125.98,3565.98 Q3.1
  Bottom Layer w15: v1(4644.45,3435) 5085,3435 5105,3455 v1(5105,3500)
ENC_A: ENC1.1 P4.1 U1.29 | length 1691.7
  Top Layer w12: ENC1.1 3951.55,2811.57 cw(c3951.55,2843.27) 3929.14,2820.86 cw(c3963.28,2855) 3915,2855 3915,3171.64 cw(c3971.39,3171.64) 3931.52,3211.52 cw(c3975,3168.03) 3975,3229.53 U1.29
  Bottom Layer w12: P4.1 3350.86,2930 cw(c3350.86,2915.86) 3365,2915.86 3365,2915 ccw(c3380,2915) 3380,2900 3882.93,2900 cw(c3882.93,2882.93) 3895,2895 cw(c3882.93,2882.93) 3900,2882.93 3900,2844.14 ccw(c3934.14,2844.14) 3910,2820 ccw(c3930.34,2840.34) 3930.34,2811.57 ENC1.1
ENC_B: ENC1.3 P4.2 U1.30 | length 1443.4
  Top Layer w12: ENC1.3 3975,3008.43 cw(c3975,3029.07) 3960.4,3014.47 cw(c3981.76,3035.83) 3951.55,3035.83 3951.55,3162.54 cw(c3997.46,3162.54) 3965,3195 cw(c4000.83,3159.17) 4000.83,3209.84 U1.30
  Bottom Layer w12: P4.2 3350.86,3030 cw(c3350.86,2995.86) 3375,3020 cw(c3362.93,3007.93) 3380,3007.93 3380,2974.14 ccw(c3414.14,2974.14) 3390,2950 ccw(c3414.14,2974.14) 3414.14,2940 3882.93,2940 ccw(c3882.93,2957.07) 3895,2945 ccw(c3882.93,2957.07) 3900,2957.07 3900,2987.93 cw(c3917.07,2987.93) 3905,3000 cw(c3925.34,2979.66) 3925.34,3008.43 ENC1.3
GND: C1.2 C2.2 C3.2 C4.2 C5.2 C6.2 C7.2 C8.2 C9.2 C10.2 C11.2 C12.2 C13.2 C14.2 C15.2 C16.2 C17.2 C18.2 C19.2 C20.2 C21.2 C22.2 C23.2 C26.2 C27.2 C28.2 C29.2 C30.2 C31.2 C32.2 C33.2 C34.2 C35.2 D1.1 D4.1 ENC1.2 ENC1.5 ENC1.6 ENC1.7 J1.2 J2.2 MECH1.1 MECH2.1 MECH3.1 MECH4.1 P1.4 P3.5 P4.4 P5.3 Q2.2 Q3.2 R13.1 R19.1 R20.1 S1.3 S1.4 S2.3 S2.4 S3.3 S3.4 S4.3 S4.4 S5.1 U1.8 U1.23 U1.35 U1.47 U2.2 U2.EP1 U3.2 U4.1 U4.2 U4.3 U5.4
HAND_REC: R21.1 U1.17 | length 134.1
  Top Layer w12: U1.17 4514.53,3450 4525,3460.47 R21.1
HEATER: J2.1 Q1.2 | length 1245.1
  Bottom Layer w70: Q1.2 5080,3790 5120,3830 5615,3830 5670,3775 5670,3640 5720,3590 J2.1
LED: R5.2 U1.2 | length 106.9
  Top Layer w12: U1.2 4693.58,3111.42 4700,3105 R5.2
NetC19_1: C19.1 U1.6 X1.1 | length 461.7
  Top Layer w10: U1.6 4840.16,3190.16 4915,3265 X1.1@4915,3280 ; X1.1@4925,3280 X1.1 5069.65,3280 C19.1
NetC20_1: C20.1 U1.5 X1.2 | length 463.2
  Top Layer w10: U1.5 4839.53,3170.47 4930,3080 X1.2 5069.65,3080 C20.1
NetC28_1: C28.1 R15.2 U4.8 | length 123
  Top Layer w10: U4.8 4228.39,3731.61 4235,3725 C28.1@4289.65,3725
  Top Layer w12: R15.2 4289.25,3730.39 C28.1
NetD1_2: D1.2 R3.1 | length 49.3
  Top Layer w12: D1.2@5465,3845 R3.1
NetD4_2: D4.2 R5.1 | length 45.3
  Top Layer w12: D4.2 R5.1
NetLS1_1: LS1.1 R14.1 | length 265.2
  Top Layer w30: LS1.1 5636.46,3349.8 5670,3316.26 R14.1
NetLS1_2: LS1.2 Q3.3 | length 362.3
  Top Layer w30: Q3.3 5538.58,3528.58 5560,3550 LS1.2
NetQ1_1: Q1.1 Q2.3 R6.1 | length 327.7
  Top Layer w30: Q2.3 4980,3691.5 4970.75,3700.75 4970.75,3710 Q1.1@4980,3719.25
  Top Layer w50: Q1.1 4980,3719.25 4980,3847 R6.1@5008,3875
NetR2_2: R2.2 U2.1 | length 61.5
  Top Layer w15: U2.1 5543.82,3116.18 5555,3105 R2.2@5555,3095
NetR9_1: R9.1 R12.2 U5.1 | length 352.3
  Top Layer w15: R12.2@4445,3755.75 4445,3765 4450,3770 U5.1 4560.75,3770 4575.08,3755.67 R9.1
NetR9_2: R9.2 R16.2 R21.2 U1.11 | length 919.6
  Top Layer w10: R16.2@4175.75,3625 4175.75,3595.08 4210.83,3560 4505,3560 4525,3540 R21.2 4526.5,3519.25 R9.2 ; R9.2@4575,3520 4710,3520 4730,3500 4730,3310 4708.58,3288.58 U1.11
NetR10_2: R10.2 U5.3 | length 72.3
  Top Layer w15: R10.2 U5.3
NetR11_1: R11.1 U4.5 | length 58.5
  Top Layer w10: R11.1 4151.61,3702.36 U4.5
NetR11_2: R11.2 R16.1 U4.6 | length 96
  Top Layer w12: R16.1@4175.75,3655 4177.2,3656.46 U4.6
NetR12_1: R12.1 R20.2 U5.2 | length 117.4
  Top Layer w15: R20.2 4410,3719.25 4409.25,3720 U5.2 U5.2@4507.76,3714.68
NetR18_2: R18.2 U5.5 | length 61.6
  Top Layer w10: U5.5 R18.2
NetR19_2: R19.2 U5.6 | length 66.6
  Top Layer w10: U5.6 R19.2@4794.25,3670
NRST: C33.1 P3.4 R1.1 S5.2 U1.7 | length 1661.5
  Top Layer w10: v1(4560,3209.84) U1.7 ; S5.2 5190,2954.35 C33.1 R1.1
  Bottom Layer w10: v1@4560,3204.84 4560,2720 4575,2705 5020,2705 5035,2720 P3.4 5035,2935 5055,2955 v1(5225,2955)
PROFILE: P7.2 U1.32 | length 223.4
  Top Layer w10: P7.2@4130,3135 4130,3157.54 4142.93,3170.47 U1.32
PWM_OUT: Q2.1 U1.12 | length 464
  Top Layer w12: U1.12 4683.27,3308.27 4695,3320 v1(4695,3479.84)
  Top Layer w15: v1(4870,3479.84) 4939.76,3479.84 4941.26,3481.34 Q2.1@4942.6,3480
  Bottom Layer w15: v1(4695,3479.84) v1(4870,3479.84)
RX: P5.1 U1.43 | length 677.6
  Top Layer w12: P5.1@4120.75,2705 P5.1 4208.71,2705 ccw(c4208.71,2732.82) 4228.39,2713.15 ccw(c4212.42,2729.12) 4235,2729.12 4235,2930 cw(c4268.15,2930) 4268.15,2963.15 4478.46,2963.15 ccw(c4478.46,2979.53) 4494.84,2979.53 U1.43
SCL: P1.3 R7.1 U1.45 | length 383.5
  Top Layer w12: P1.3 4410,2844.25 R7.1 4409.25,2893.15 4421.1,2905 4525,2905 4534.21,2914.21 U1.45
SDA: P1.2 R8.1 U1.46 | length 303.4
  Top Layer w12: P1.2 4510.59,2770.59 R8.1 4510.59,2865.59 4520,2875 4545,2875 4553.9,2883.9 U1.46
SW: C21.1 ENC1.4 P4.3 U1.22 | length 2085.4
  Top Layer w12: P4.3 3355,3130 3375,3110 3375,2830 3393.43,2811.57 ENC1.4 C21.1@3520,2811.57 ; C21.1 3795.35,2810.35 3825,2840 3825,3245 3855,3275 4070,3275 4090,3295 4090,3430 4113.74,3453.74 4401.26,3453.74 4416.1,3438.9 U1.22
SW1: C4.1 P4.7 S1.1 S1.2 U1.18 | length 1781.2
  Top Layer w12: S1.2 S1.1 4042.95,3652.05 4057.05,3637.95 4097.05,3637.95 4200,3535 4455,3535 4494.84,3495.16 U1.18
  Bottom Layer w12: P4.7 3345,3530 3355,3540 3355,3585 3370,3600 4020,3600 4042.95,3622.95 S1.1
SW2: C5.1 P4.8 S2.1 S2.2 U1.19 | length 1680.6
  Top Layer w12: S2.2 S2.1 3677.95,3627.8 3695.75,3610 4090,3610 4185,3515 4440,3515 4475.16,3479.84 U1.19
  Bottom Layer w12: P4.8 3655,3630 3677.95,3652.95 S2.1
SW3: C22.1 P4.6 R4.1 S3.1 S3.2 U1.20 | length 2225.2
  Top Layer w12: S3.1 S3.2 3677.95,3562.95 3695.75,3580.75 4084.25,3580.75 4170,3495 4425,3495 4455.47,3464.53 U1.20 ; v1(4120,3410.35) 4120.35,3410 R4.1
  Bottom Layer w12: P4.6 3360,3430 3375,3415 3375,3305 3390,3290 3665,3290 3677.95,3302.95 S3.1 3677.95,3395 3693.31,3410.35 v1(4120,3410.35)
SW4: C23.1 P4.5 S4.1 S4.2 U1.21 | length 1588.8
  Top Layer w12: S4.1 S4.2 ; S4.2@4042.95,3535 S4.2 ; U1.21 4435.79,3453.74 4415.76,3473.76 4156.24,3473.76 4101.42,3528.58 S4.2
  Bottom Layer w12: P4.5 3340,3330 3350.86,3319.14 3350.86,3274.14 3365,3260 4030,3260 4042.95,3272.95 S4.1
SWCLK: P3.3 U1.37 | length 1304.4
  Top Layer w10: v1(4297.01,3040) 4297.56,3040.55 U1.37
  Top Layer w12: v1(4265,2635) 4920,2635 4935,2650 P3.3
  Bottom Layer w12: v1(4265,2635) 4265,3025 4280,3040 v1(4297.01,3040)
SWDIO: P3.2 U1.34 | length 1235.7
  Top Layer w12: v1(4235,2665) 4815,2665 4835,2685 P3.2 ; v1(4260,3131.1) U1.34
  Bottom Layer w12: v1(4235,2665) 4235,3106.85 4259.25,3131.1 v1(4260,3131.1)
TC: C32.1 P6.2 R10.1 R15.1 | length 501.8
  Top Layer w10: R10.1 4375,3670 4360,3685 4360,3760 4350,3770 R15.1 4320.75,3895.75 4340,3915 P6.2
TR: P6.1 R17.2 U1.10 | length 864
  Top Layer w10: P6.1 4615,3570 4640,3545 4733.58,3545 4760,3518.58 4760,3290.35 4738.54,3268.9 U1.10
TX: P5.2 U1.42 | length 535.2
  Top Layer w12: P5.2@4135,2805 4180.47,2805 ccw(c4180.47,2834.75) 4201.51,2813.71 ccw(c4181.01,2834.21) 4210,2834.21 4210,2935 cw(c4260,2935) 4260,2985 4460.16,2985 ccw(c4460.16,3000) 4475.16,3000 U1.42
VIN: C3.1 C34.1 J1.1 Q1.3 R6.2 TP1.1 U3.1 | length 2825.8
  Top Layer w10: Q1.3 5675,3710 5690,3725 TP1.1
  Top Layer w30: C3.1 C34.1 5454.29,2700 U3.1@5455,2699.29
  Top Layer w50: R6.2 5170,3865 5180,3855 Q1.3
  Bottom Layer w70: Q1.3 5385,3710 5465,3630 5465,3100 ; U3.1 5465,3100 ; J1.1 5523.07,3158.07 5465,3100
pads on no net: U1.1 U1.3 U1.4 U1.13 U1.14 U1.15 U1.25 U1.26 U1.27 U1.28 U1.31 U1.33 U1.38 U1.39 U1.40 U1.41 U2.3 U2.5 U4.4 U5.7

## Silkscreen, mask and mechanical layers (free items; w line width, h text height)
Top Overlay:
  lines w6: 4340,2845 4340,2945 4380,2945 4380,2845 4340,2845
  text "SW2" at 3130,3615 h30
  text "+" at 6225,3580 h40 r90
  text "SW1" at 3130,3515 h30
  text "SW3" at 3130,3413.15 h30
  text "SW4" at 3130,3315 h30
  text "GND" at 3130,3215 h30
  text "+" at 6225,3145 h40 r90
  text "SW" at 3130,3115 h30
  text "E_A" at 3130,3015 h30
  text "E_B" at 3130,2915 h30
  text "TX" at 4235,2780 h30 r90
  text "RX" at 4235,2680 h30 r90
  text "GND" at 4325,2620 h30 r90
  text "SCL" at 4425,2620 h30 r90
  text "SDA" at 4525,2620 h30 r90
  text "3V3" at 4630,2620 h30 r90
Bottom Overlay:
  text "TC" at 4585,4000 h30
  text "TR" at 4690,4000 h30
  text "3V3" at 4635,2465 h30 r90
  text "GND" at 4325,2450 h30 r90
  text "SCL" at 4420,2445 h30 r90
  text "SDA" at 4515,2445 h30 r90

## Dimensions
6225,3975 to 6225,2575 on Top Overlay
3075,3975 to 6225,3975 on Top Overlay

## Text inside footprints (layer, text, board x,y; h text height)
C1: Mechanical 17 "d" at 5660,2860 h30; Mechanical 19 "-" at 5660,2860 h30
C2: Mechanical 17 "d" at 5655.65,2818 h30; Mechanical 19 "-" at 5655.65,2818 h30
C3: Mechanical 17 "d" at 5240,2690 h30 r90; Mechanical 19 "-" at 5240,2690 h30 r90
C4: Mechanical 17 "d" at 4054,3794.76 h30 r180; Mechanical 19 "-" at 4054,3794.76 h30 r180
C5: Mechanical 17 "d" at 3689,3794.76 h30 r180; Mechanical 19 "-" at 3689,3794.76 h30 r180
C6: Mechanical 17 "d" at 4795,3280.35 h30 r270; Mechanical 19 "-" at 4795,3280.35 h30 r270
C7: Mechanical 17 "d" at 4753,3258.53 h30 r270; Mechanical 19 "-" at 4753,3258.53 h30 r270
C8: Mechanical 17 "d" at 4713,3258.53 h30 r270; Mechanical 19 "-" at 4713,3258.53 h30 r270
C9: Mechanical 17 "d" at 4211.26,3410 h30 r270; Mechanical 19 "-" at 4211.26,3410 h30 r270
C10: Mechanical 17 "d" at 4210,3095 h30 r270; Mechanical 19 "-" at 4210,3095 h30 r270
C11: Mechanical 17 "d" at 4258,3419 h30 r270; Mechanical 19 "-" at 4258,3419 h30 r270
C12: Mechanical 17 "d" at 4253,3104 h30 r270; Mechanical 19 "-" at 4253,3104 h30 r270
C13: Mechanical 17 "d" at 4581,2963 h30; Mechanical 19 "-" at 4581,2963 h30
C14: Mechanical 17 "d" at 4590,2915 h30; Mechanical 19 "-" at 4590,2915 h30
C15: Mechanical 17 "d" at 5595,3015 h30 r270; Mechanical 19 "-" at 5595,3015 h30 r270
C16: Mechanical 17 "d" at 5553,3024 h30 r270; Mechanical 19 "-" at 5553,3024 h30 r270
C17: Mechanical 17 "d" at 5387,3000.65 h30 r90; Mechanical 19 "-" at 5387,3000.65 h30 r90
C18: Mechanical 17 "d" at 5345,3010 h30 r90; Mechanical 19 "-" at 5345,3010 h30 r90
C19: Mechanical 17 "d" at 5068,3294 h30 r270; Mechanical 19 "-" at 5068,3294 h30 r270
C20: Mechanical 17 "d" at 5072,3066 h30 r90; Mechanical 19 "-" at 5072,3066 h30 r90
C21: Mechanical 17 "d" at 3518,2824 h30 r270; Mechanical 19 "-" at 3518,2824 h30 r270
C22: Mechanical 17 "d" at 3689,3440.9 h30 r180; Mechanical 19 "-" at 3689,3440.9 h30 r180
C23: Mechanical 17 "d" at 4054,3442 h30 r180; Mechanical 19 "-" at 4054,3442 h30 r180
C26: Mechanical 17 "d" at 4748.86,3825 h30 r90; Mechanical 19 "-" at 4748.86,3825 h30 r90
C27: Mechanical 17 "d" at 4792,3756 h30 r90; Mechanical 19 "-" at 4792,3756 h30 r90
C28: Mechanical 17 "d" at 4276,3728 h30; Mechanical 19 "-" at 4276,3728 h30
C29: Mechanical 17 "d" at 4205,3645 h30; Mechanical 19 "-" at 4205,3645 h30
C30: Mechanical 17 "d" at 4199.39,3693 h30; Mechanical 19 "-" at 4199.39,3693 h30
C31: Mechanical 17 "d" at 4702,3816.91 h30 r90; Mechanical 19 "-" at 4702,3816.91 h30 r90
C32: Mechanical 17 "d" at 4334.35,3812 h30 r180; Mechanical 19 "-" at 4334.35,3812 h30 r180
C33: Mechanical 17 "d" at 5204,2956 h30 r180; Mechanical 19 "-" at 5204,2956 h30 r180
C34: Mechanical 17 "d" at 5325,2690 h30 r90; Mechanical 19 "-" at 5325,2690 h30 r90
C35: Mechanical 17 "d" at 5670,2989.53 h30; Mechanical 19 "-" at 5670,2949.53 h30
D1: Mechanical 17 "d" at 5470,3775 h30 r90; Mechanical 19 "-" at 5470,3775 h30 r90
D4: Mechanical 17 "d" at 4705,2915 h30 r90; Mechanical 19 "-" at 4705,2915 h30 r90
J1: Mechanical 17 "d" at 6040,3229.65 h30 r270; Mechanical 19 "-" at 6040,3229.65 h30 r270
J2: Mechanical 17 "d" at 6040,3661.57 h30 r270; Mechanical 19 "-" at 6040,3661.57 h30 r270
MECH1: Mechanical 17 "d" at 3094,3806 h30; Mechanical 19 "-" at 3093.47,3805.32 h30
MECH2: Mechanical 17 "d" at 3114,2711 h30; Mechanical 19 "-" at 3113.47,2710.32 h30
MECH3: Mechanical 17 "d" at 5959,3816 h30; Mechanical 19 "-" at 5958.47,3815.32 h30
MECH4: Mechanical 17 "d" at 5959,2696 h30; Mechanical 19 "-" at 5958.47,2695.32 h30
P1: Mechanical 17 "d" at 4645,2800 h30 r180; Mechanical 19 "-" at 4645,2800 h30 r180
P3: Top Overlay "3V3" at 4750,2620 h30 r90; Top Overlay "CLK" at 4950,2620 h30 r90; Top Overlay "DIO" at 4850,2625 h30 r90; Top Overlay "RST" at 5050,2620 h30 r90; Top Overlay "GND" at 5150,2620 h30 r90
P4: Mechanical 17 "d" at 3330,2940 h30 r90; Mechanical 19 "-" at 3335,3030 h30 r90
P5: Mechanical 17 "d" at 4160,2660 h30 r90; Mechanical 19 "-" at 4160,2660 h30 r90
P6: Mechanical 17 "d" at 4650,3925 h30 r180; Mechanical 19 "-" at 4650,3925 h30 r180
P7: Mechanical 17 "d" at 4140,2990 h30 r90; Mechanical 19 "-" at 4140,2990 h30 r90
R1: Mechanical 17 "d" at 5293.87,2951.08 h30; Mechanical 19 "-" at 5294,2951 h30
R2: Mechanical 17 "d" at 5557.92,3043.87 h30 r90; Mechanical 19 "-" at 5558,3044 h30 r90
R3: Mechanical 17 "d" at 5467.92,3878.87 h30 r90; Mechanical 19 "-" at 5468,3879 h30 r90
R4: Mechanical 17 "d" at 4128.87,3407.08 h30; Mechanical 19 "-" at 4129,3407 h30
R5: Mechanical 17 "d" at 4702.92,3009.42 h30 r90; Mechanical 19 "-" at 4703,3009.55 h30 r90
R6: Mechanical 17 "d" at 5020,3840 h30; Mechanical 19 "-" at 5020,3840 h30
R7: Mechanical 17 "d" at 4393.87,2842.08 h30; Mechanical 19 "-" at 4394,2842 h30
R8: Mechanical 17 "d" at 4525.97,2847.92 h30 r180; Mechanical 19 "-" at 4525.84,2848 h30 r180
R9: Mechanical 17 "d" at 4572.16,3566.13 h30 r270; Mechanical 19 "-" at 4572.08,3566 h30 r270
R10: Mechanical 17 "d" at 4393.87,3667.08 h30; Mechanical 19 "-" at 4394,3667 h30
R11: Mechanical 17 "d" at 4128.87,3692.08 h30; Mechanical 19 "-" at 4129,3692 h30
R12: Mechanical 17 "d" at 4447.92,3703.87 h30 r90; Mechanical 19 "-" at 4448,3704 h30 r90
R13: Mechanical 17 "d" at 4302.92,2878.87 h5.12 r90; Mechanical 19 "-" at 4303,2879 h5.12 r90
R14: Mechanical 17 "d" at 5650,3185 h10 r270; Mechanical 19 "-" at 5650,3185 h10 r270
R15: Mechanical 17 "d" at 4336.13,3772.92 h30 r180; Mechanical 19 "-" at 4336,3773 h30 r180
R16: Mechanical 17 "d" at 4172.08,3671.13 h30 r270; Mechanical 19 "-" at 4172,3671 h30 r270
R17: Mechanical 17 "d" at 4661.13,3832.92 h30 r180; Mechanical 19 "-" at 4661,3833 h30 r180
R18: Mechanical 17 "d" at 4836.13,3622.92 h30 r180; Mechanical 19 "-" at 4836,3623 h30 r180
R19: Mechanical 17 "d" at 4787.08,3716.13 h30 r270; Mechanical 19 "-" at 4787,3716 h30 r270
R20: Mechanical 17 "d" at 4402.08,3766.13 h30 r270; Mechanical 19 "-" at 4402,3766 h30 r270
R21: Mechanical 17 "d" at 4527.92,3473.87 h30 r90; Mechanical 19 "-" at 4528,3474 h30 r90
S5: Mechanical 17 "d" at 5140,3310 h30 r270; Mechanical 19 "-" at 5140,3310 h30 r270
TP1: Mechanical 17 "d" at 5701.81,3769.17 h30 r90; Mechanical 19 "-" at 5702.8,3771.14 h30 r90
TP2: Mechanical 17 "d" at 5701.81,3914.17 h30 r90; Mechanical 19 "-" at 5702.8,3916.14 h30 r90
TP3: Mechanical 17 "d" at 5701.81,3839.17 h30 r90; Mechanical 19 "-" at 5702.8,3841.14 h30 r90
U1: Mechanical 17 "d" at 4585,3210 h30 r180; Mechanical 19 "-" at 4585,3210 h30 r180
U2: Mechanical 17 "d" at 5515.75,3075 h30 r180; Mechanical 19 "-" at 5515.75,3075 h30 r180
X1: Mechanical 17 "d" at 4860,3405 h30 r270; Mechanical 19 "-" at 4860,3340 h30 r270